# EAGLE board New_stage_1_PCP_(1.2.18)_v18 (EAGLE 9.7.0)
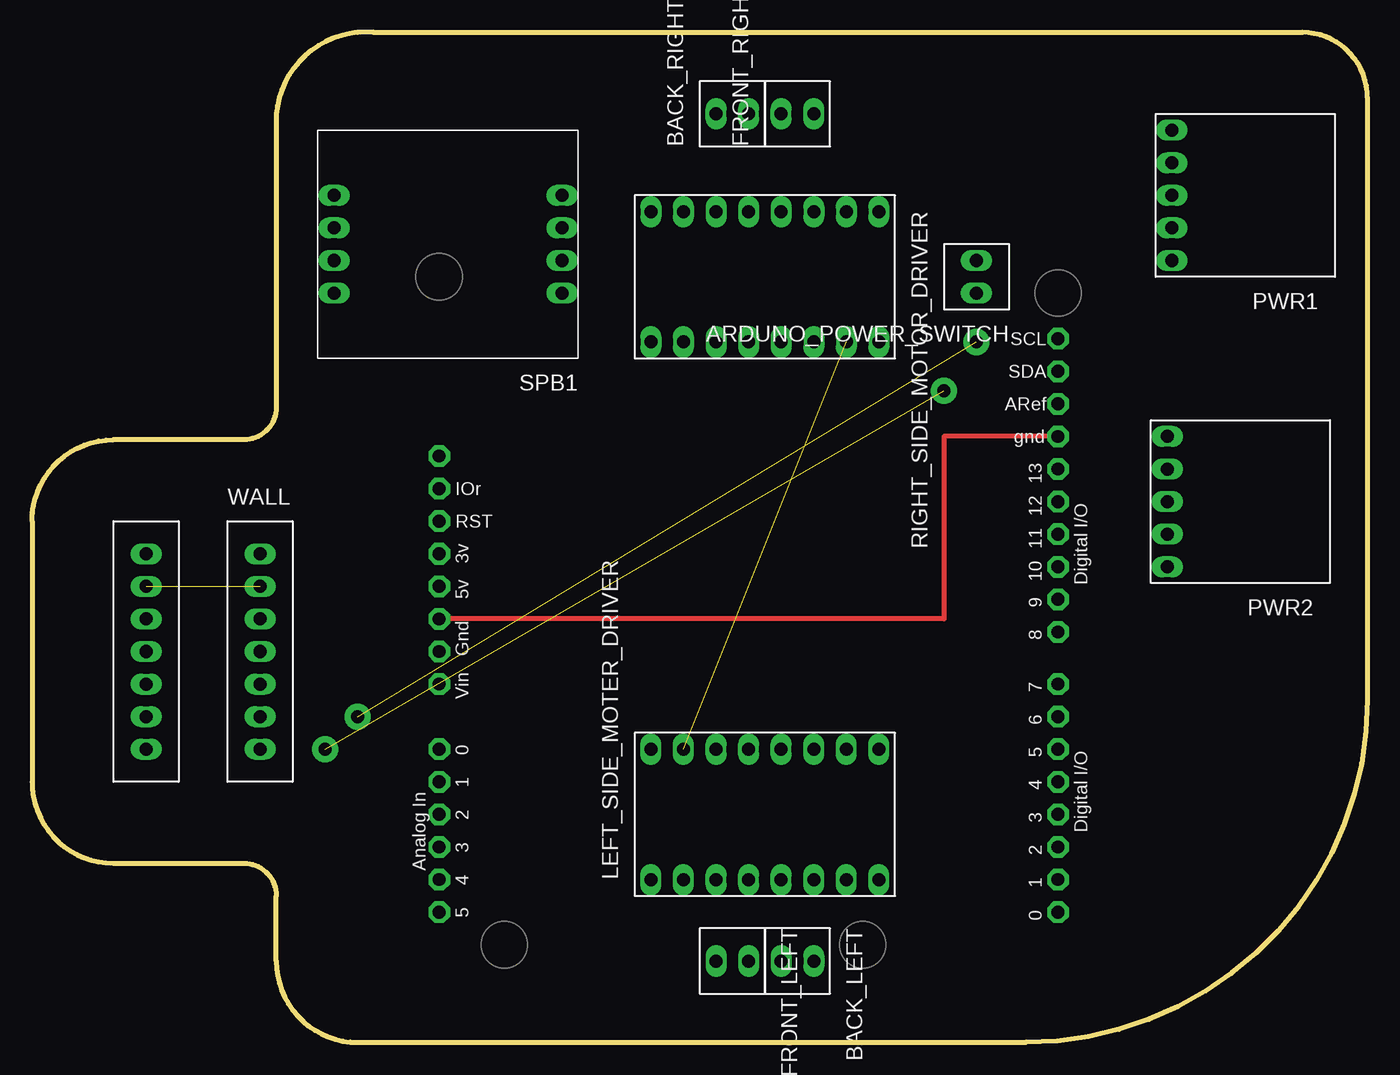
[diagram p0: board, top side]
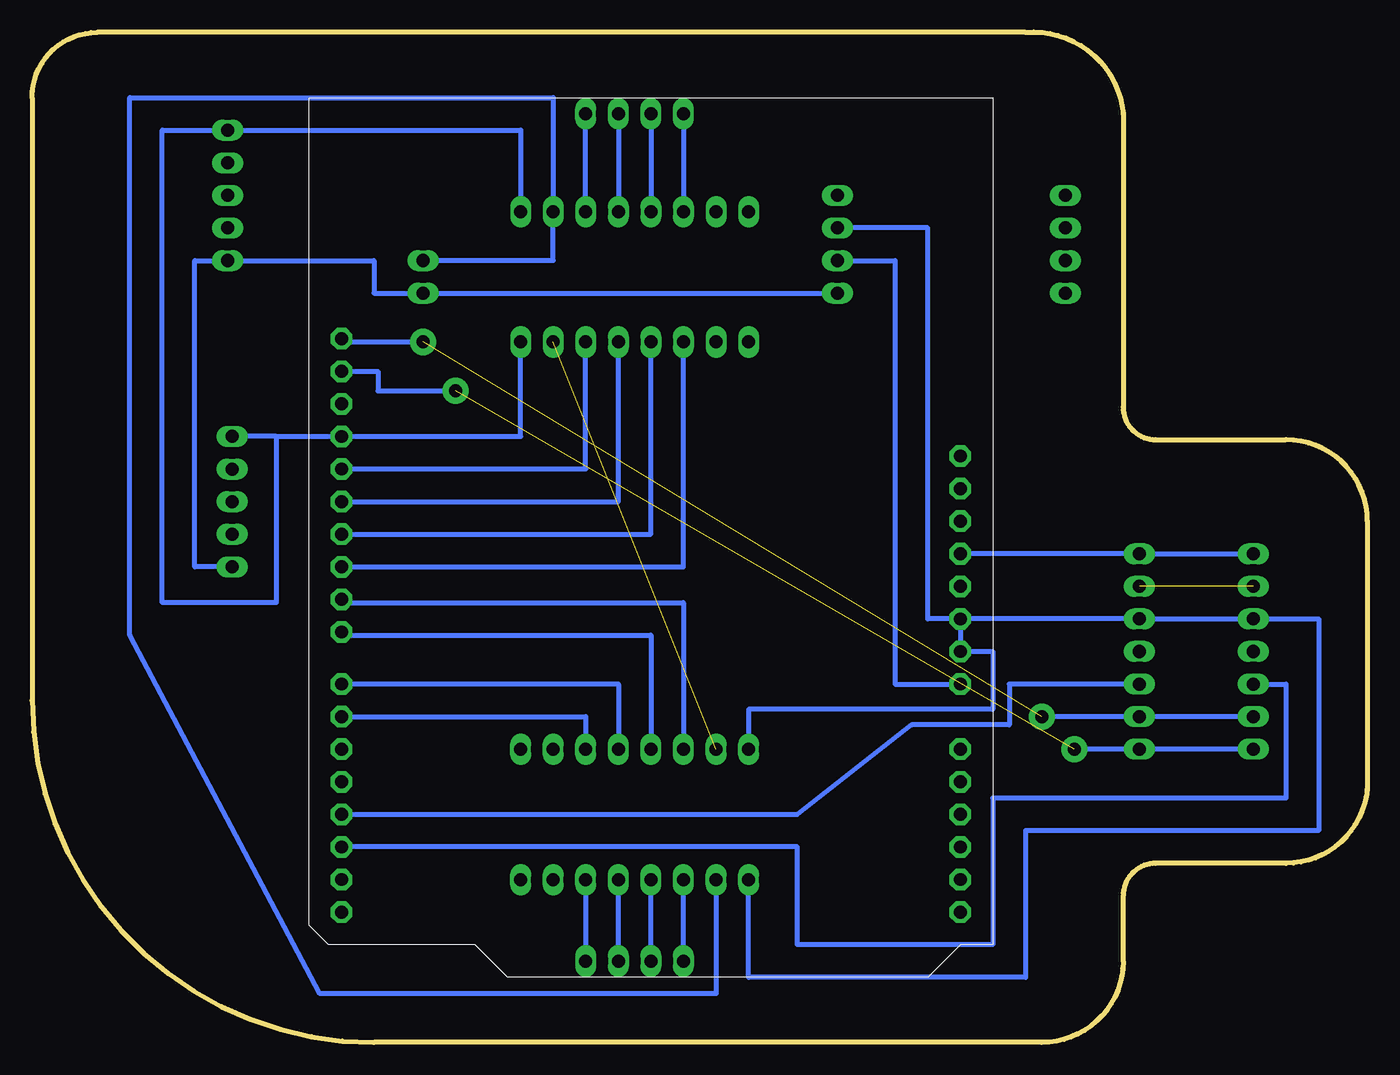
[diagram p1: board, bottom side, seen from below]

Size 104.14 x 78.77 mm. Coordinates in mm from the lower left corner, seen from the top.
Outline: 104.14,73.66 104.14,26.67 arc-90 77.47,0 25.4,0 arc-90 19.05,6.35 19.05,11.43 arc90 16.51,13.97 6.35,13.97 arc-90 0,20.32 0,40.64 arc-90 6.35,46.99 16.51,46.99 arc90 19.05,49.53 19.05,72.39 arc-90 26.67,78.74 99.06,78.74 arc-90 104.14,73.66
Copper layers (1*16): Top 0.035mm / dielectric 1.5mm / Bottom 0.035mm
Design rules "OthermillDRC_1_32_v2": minimum track width 8mil, minimum drill 0.8mm, track to track 0.794003125mm, track to pad 0.794003125mm, pad to pad 0.794003125mm, via to via 0.794003125mm, smd to smd 0mil, copper to edge 0mil, drill to drill 1mil, minimum pad ring 10mil, minimum via ring 10mil, stop-mask expansion 1mil, vias tented up to drill 30mil, thermal gap 10mil

## Footprints (pad centres in the part's own frame; a part is rotated, then mirrored left to right if it is on the bottom)
MOTOR_OUTPUT_PINS = drill 1.016 pad 1.651 long: 1 0,1.27; 2 0,-1.27
DISTANCE_SENS_OUT = drill 1.016 pad 1.651 long: 1 0,7.62; 2 0,5.08; 3 0,2.54; 4 0,0; 5 0,-2.54; 6 0,-5.08; 7 0,-7.62
MOTOR_DRIVER = drill 1.016 pad 1.651 long: 1 -5.08,8.89; 2 -5.08,6.35; 3 -5.08,3.81; 4 -5.08,1.27; 5 -5.08,-1.27; 6 -5.08,-3.81; 7 -5.08,-6.35; 8 -5.08,-8.89; 9 5.08,8.89; 10 5.08,6.35; 11 5.08,3.81; 12 5.08,1.27; 13 5.08,-1.27; 14 5.08,-3.81; 15 5.08,-6.35; 16 5.08,-8.89
MICRO-USB_ADAPTER = drill 1.016 pad 1.651 long: 1 6.35,5.08; 2 6.35,2.54; 3 6.35,0; 4 6.35,-2.54; 5 6.35,-5.08
ADAFRUIT-SOFT-POWER-BUTTON_FOOTPRINT = drill 1.016 pad 1.651 long: 1 8.89,3.81; 2\ 8.89,1.27; 3 8.89,-1.27; 4 8.89,-3.81; 5 -8.89,3.81; 6 -8.89,1.27; 7 -8.89,-1.27; 8 -8.89,-3.81
ARDUINOR3-BPLACE = drill 1 pad 1.676 octagon: 3V 35.56,2.54; 5V 38.1,2.54; A0 50.8,2.54; A1 53.34,2.54; A2 55.88,2.54; A3 58.42,2.54; A4 60.96,2.54; A5 63.5,2.54; AREF 23.876,50.8; D0 63.5,50.8; D1 60.96,50.8; D2 58.42,50.8; D3 55.88,50.8; D4 53.34,50.8; D5 50.8,50.8; D6 48.26,50.8; D7 45.72,50.8; D8 41.656,50.8; D9 39.116,50.8; D10 36.576,50.8; D11 34.036,50.8; D12 31.496,50.8; D13 28.956,50.8; GND 26.416,50.8; GND1 43.18,2.54; GND2 40.64,2.54; IOREF 30.48,2.54; RESERVED 27.94,2.54; RESET 33.02,2.54; SCL 18.796,50.8; SDA 21.336,50.8; VIN 45.72,2.54

## Placement (x,y rotation side)
ARDUNO_POWER_SWITCH  MOTOR_OUTPUT_PINS  [MOTOR_OUTPUT_PINS]  73.66,59.69 180 top
BACK_LEFT  MOTOR_OUTPUT_PINS  [MOTOR_OUTPUT_PINS]  59.69,6.35 270 top
BACK_RIGHT  MOTOR_OUTPUT_PINS  [MOTOR_OUTPUT_PINS]  54.61,72.39 90 top
CLIFF  DIST_SENS_OUTPUTPINS  [DISTANCE_SENS_OUT]  8.89,30.48 0 top
FRONT_LEFT  MOTOR_OUTPUT_PINS  [MOTOR_OUTPUT_PINS]  54.61,6.35 270 top
FRONT_RIGHT  MOTOR_OUTPUT_PINS  [MOTOR_OUTPUT_PINS]  59.69,72.39 90 top
LEFT_SIDE_MOTER_DRIVER  MOTOR_DRIVER  [MOTOR_DRIVER]  57.15,17.78 90 top
PWR1  MICRO-USB_ADAPTER  [MICRO-USB_ADAPTER]  95.25,66.04 180 top
PWR2  MICRO-USB_ADAPTER  [MICRO-USB_ADAPTER]  94.87,42.16 180 top
RIGHT_SIDE_MOTOR_DRIVER  MOTOR_DRIVER  [MOTOR_DRIVER]  57.15,59.69 270 top
SPB1  SOFT-POWER_BUTTON  [ADAFRUIT-SOFT-POWER-BUTTON_FOOTPRINT]  32.44,62.23 180 top
U2  ARDUINOR3-BPLACE  [ARDUINOR3-BPLACE]  29.21,73.66 270 top
WALL  DIST_SENS_OUTPUTPINS  [DISTANCE_SENS_OUT]  17.78,30.48 0 top

## Library data of the parts
ARDUNO_POWER_SWITCH BACK_LEFT BACK_RIGHT FRONT_LEFT FRONT_RIGHT = motor_output_pins
CLIFF WALL = dist_sens_output_pins
LEFT_SIDE_MOTER_DRIVER RIGHT_SIDE_MOTOR_DRIVER = MOTOR_DRIVER
PWR1 PWR2 = mico-usb adapter
SPB1 = Soft-power-button library
U2 = adafruit

## Nets
2V8: CLIFF.2 WALL.2
5V: U2.5V
+3.3V: CLIFF.1 U2.3V WALL.1
+5V: SPB1.6 U2.VIN
CLIFF_SHDN: CLIFF.5 U2.D2
G: SPB1.3
GND: CLIFF.3 LEFT_SIDE_MOTER_DRIVER.1 LEFT_SIDE_MOTER_DRIVER.9 PWR1.5 PWR2.5 RIGHT_SIDE_MOTOR_DRIVER.1 RIGHT_SIDE_MOTOR_DRIVER.9 SPB1.7 U2.GND U2.GND1 U2.GND2 WALL.3
MPWR: ARDUNO_POWER_SWITCH.2 LEFT_SIDE_MOTER_DRIVER.2 RIGHT_SIDE_MOTOR_DRIVER.2
N$1: FRONT_RIGHT.2 RIGHT_SIDE_MOTOR_DRIVER.3
N$2: FRONT_RIGHT.1 RIGHT_SIDE_MOTOR_DRIVER.4
N$3: BACK_RIGHT.2 RIGHT_SIDE_MOTOR_DRIVER.5
N$4: BACK_RIGHT.1 RIGHT_SIDE_MOTOR_DRIVER.6
N$5: FRONT_LEFT.2 LEFT_SIDE_MOTER_DRIVER.3
N$6: FRONT_LEFT.1 LEFT_SIDE_MOTER_DRIVER.4
N$7: BACK_LEFT.2 LEFT_SIDE_MOTER_DRIVER.5
N$8: BACK_LEFT.1 LEFT_SIDE_MOTER_DRIVER.6
N$9: RIGHT_SIDE_MOTOR_DRIVER.11 U2.D13
N$10: RIGHT_SIDE_MOTOR_DRIVER.12 U2.D12
N$11: RIGHT_SIDE_MOTOR_DRIVER.13 U2.D11
N$12: RIGHT_SIDE_MOTOR_DRIVER.14 U2.D10
N$13: LEFT_SIDE_MOTER_DRIVER.11 U2.D9
N$14: LEFT_SIDE_MOTER_DRIVER.12 U2.D8
N$15: LEFT_SIDE_MOTER_DRIVER.13 U2.D7
N$16: LEFT_SIDE_MOTER_DRIVER.14 U2.D6
PWR_IN_5V: ARDUNO_POWER_SWITCH.1 PWR1.1 PWR2.1 SPB1.5
SCL: CLIFF.6 U2.SCL WALL.6
SDA: CLIFF.7 U2.SDA WALL.7
VMM: LEFT_SIDE_MOTER_DRIVER.10 RIGHT_SIDE_MOTOR_DRIVER.10
WALL_SHDN: U2.D3 WALL.5

## Tracks (layer width: path | path; a pad name or v marks a point on that pad's centre or on a via)
2V8  (1 unrouted)
+3.3V
  Bottom 0.406: CLIFF.1 WALL.1 U2.3V
+5V
  Bottom 0.406: U2.VIN 36.83,27.94 36.83,60.96 SPB1.6
CLIFF_SHDN
  Bottom 0.406: CLIFF.5 6.35,27.94 6.35,19.05 29.21,19.05 29.21,7.62 44.45,7.62 44.45,15.24 U2.D2
GND
  Top 0.406: U2.GND 71.12,47.24 71.12,33.02 U2.GND2
  Bottom 0.406: U2.GND2 WALL.3 CLIFF.3 3.81,33.02 3.81,16.51 26.67,16.51 26.67,5.08 48.26,5.08 LEFT_SIDE_MOTER_DRIVER.1 | 85.09,47.24 U2.GND 66.04,47.24 RIGHT_SIDE_MOTOR_DRIVER.9 | 85.09,47.24 PWR2.5 | U2.GND2 34.29,33.02 34.29,63.5 SPB1.7 | 85.09,47.24 85.09,34.29 93.98,34.29 93.98,71.12 PWR1.5 66.04,71.12 RIGHT_SIDE_MOTOR_DRIVER.1 | LEFT_SIDE_MOTER_DRIVER.9 48.26,25.97 29.21,25.97 29.21,30.48 U2.GND1 U2.GND2
MPWR
  Bottom 0.406: LEFT_SIDE_MOTER_DRIVER.2 50.8,3.81 81.7,3.81 96.52,31.75 96.52,73.66 63.5,73.66 RIGHT_SIDE_MOTOR_DRIVER.2 63.5,60.96 ARDUNO_POWER_SWITCH.2
N$1
  Bottom 0.406: RIGHT_SIDE_MOTOR_DRIVER.3 FRONT_RIGHT.2
N$2
  Bottom 0.406: FRONT_RIGHT.1 RIGHT_SIDE_MOTOR_DRIVER.4
N$3
  Bottom 0.406: BACK_RIGHT.2 RIGHT_SIDE_MOTOR_DRIVER.5
N$4
  Bottom 0.406: BACK_RIGHT.1 RIGHT_SIDE_MOTOR_DRIVER.6
N$5
  Bottom 0.406: FRONT_LEFT.2 LEFT_SIDE_MOTER_DRIVER.3
N$6
  Bottom 0.406: FRONT_LEFT.1 LEFT_SIDE_MOTER_DRIVER.4
N$7
  Bottom 0.406: BACK_LEFT.2 LEFT_SIDE_MOTER_DRIVER.5
N$8
  Bottom 0.406: LEFT_SIDE_MOTER_DRIVER.6 BACK_LEFT.1
N$9
  Bottom 0.406: U2.D13 60.96,44.7 RIGHT_SIDE_MOTOR_DRIVER.11
N$10
  Bottom 0.406: U2.D12 58.42,42.16 RIGHT_SIDE_MOTOR_DRIVER.12
N$11
  Bottom 0.406: U2.D11 55.88,39.62 RIGHT_SIDE_MOTOR_DRIVER.13
N$12
  Bottom 0.406: U2.D10 53.34,37.08 RIGHT_SIDE_MOTOR_DRIVER.14
N$13
  Bottom 0.406: U2.D9 80.01,34.29 53.34,34.29 LEFT_SIDE_MOTER_DRIVER.11
N$14
  Bottom 0.406: U2.D8 80.01,31.75 55.88,31.75 LEFT_SIDE_MOTER_DRIVER.12
N$15
  Bottom 0.406: U2.D7 58.42,27.94 LEFT_SIDE_MOTER_DRIVER.13
N$16
  Bottom 0.406: U2.D6 60.96,25.4 LEFT_SIDE_MOTER_DRIVER.14
PWR_IN_5V
  Bottom 0.406: PWR2.1 91.44,37.08 91.44,60.96 PWR1.1 77.47,60.96 77.47,58.42 ARDUNO_POWER_SWITCH.1 SPB1.5
SCL  (via drill 1.02 pad 2.03)  (1 unrouted)
  Bottom 0.406: CLIFF.6 WALL.6 v25.4,25.4 | U2.SCL 80.01,54.61 v73.66,54.61
SDA  (via drill 1.02 pad 2.03)  (1 unrouted)
  Bottom 0.406: CLIFF.7 WALL.7 v22.86,22.86 | v71.12,50.8 77.16,50.8 77.16,52.32 U2.SDA
VMM  (1 unrouted)
WALL_SHDN
  Bottom 0.406: WALL.5 27.94,27.94 27.94,24.77 35.56,24.77 44.45,17.78 U2.D3